# Altium PCB 如意硬件系统模块0831.PcbDoc (part 1 of 3)
Units mm, origin at the board's own origin, x right, y up, seen from the top; angles counter-clockwise.
Board outline 160 x 114.8 mm, 2 copper layers (Top Layer, Bottom Layer); 173 components, 141 nets, 673 pads, 206 vias.
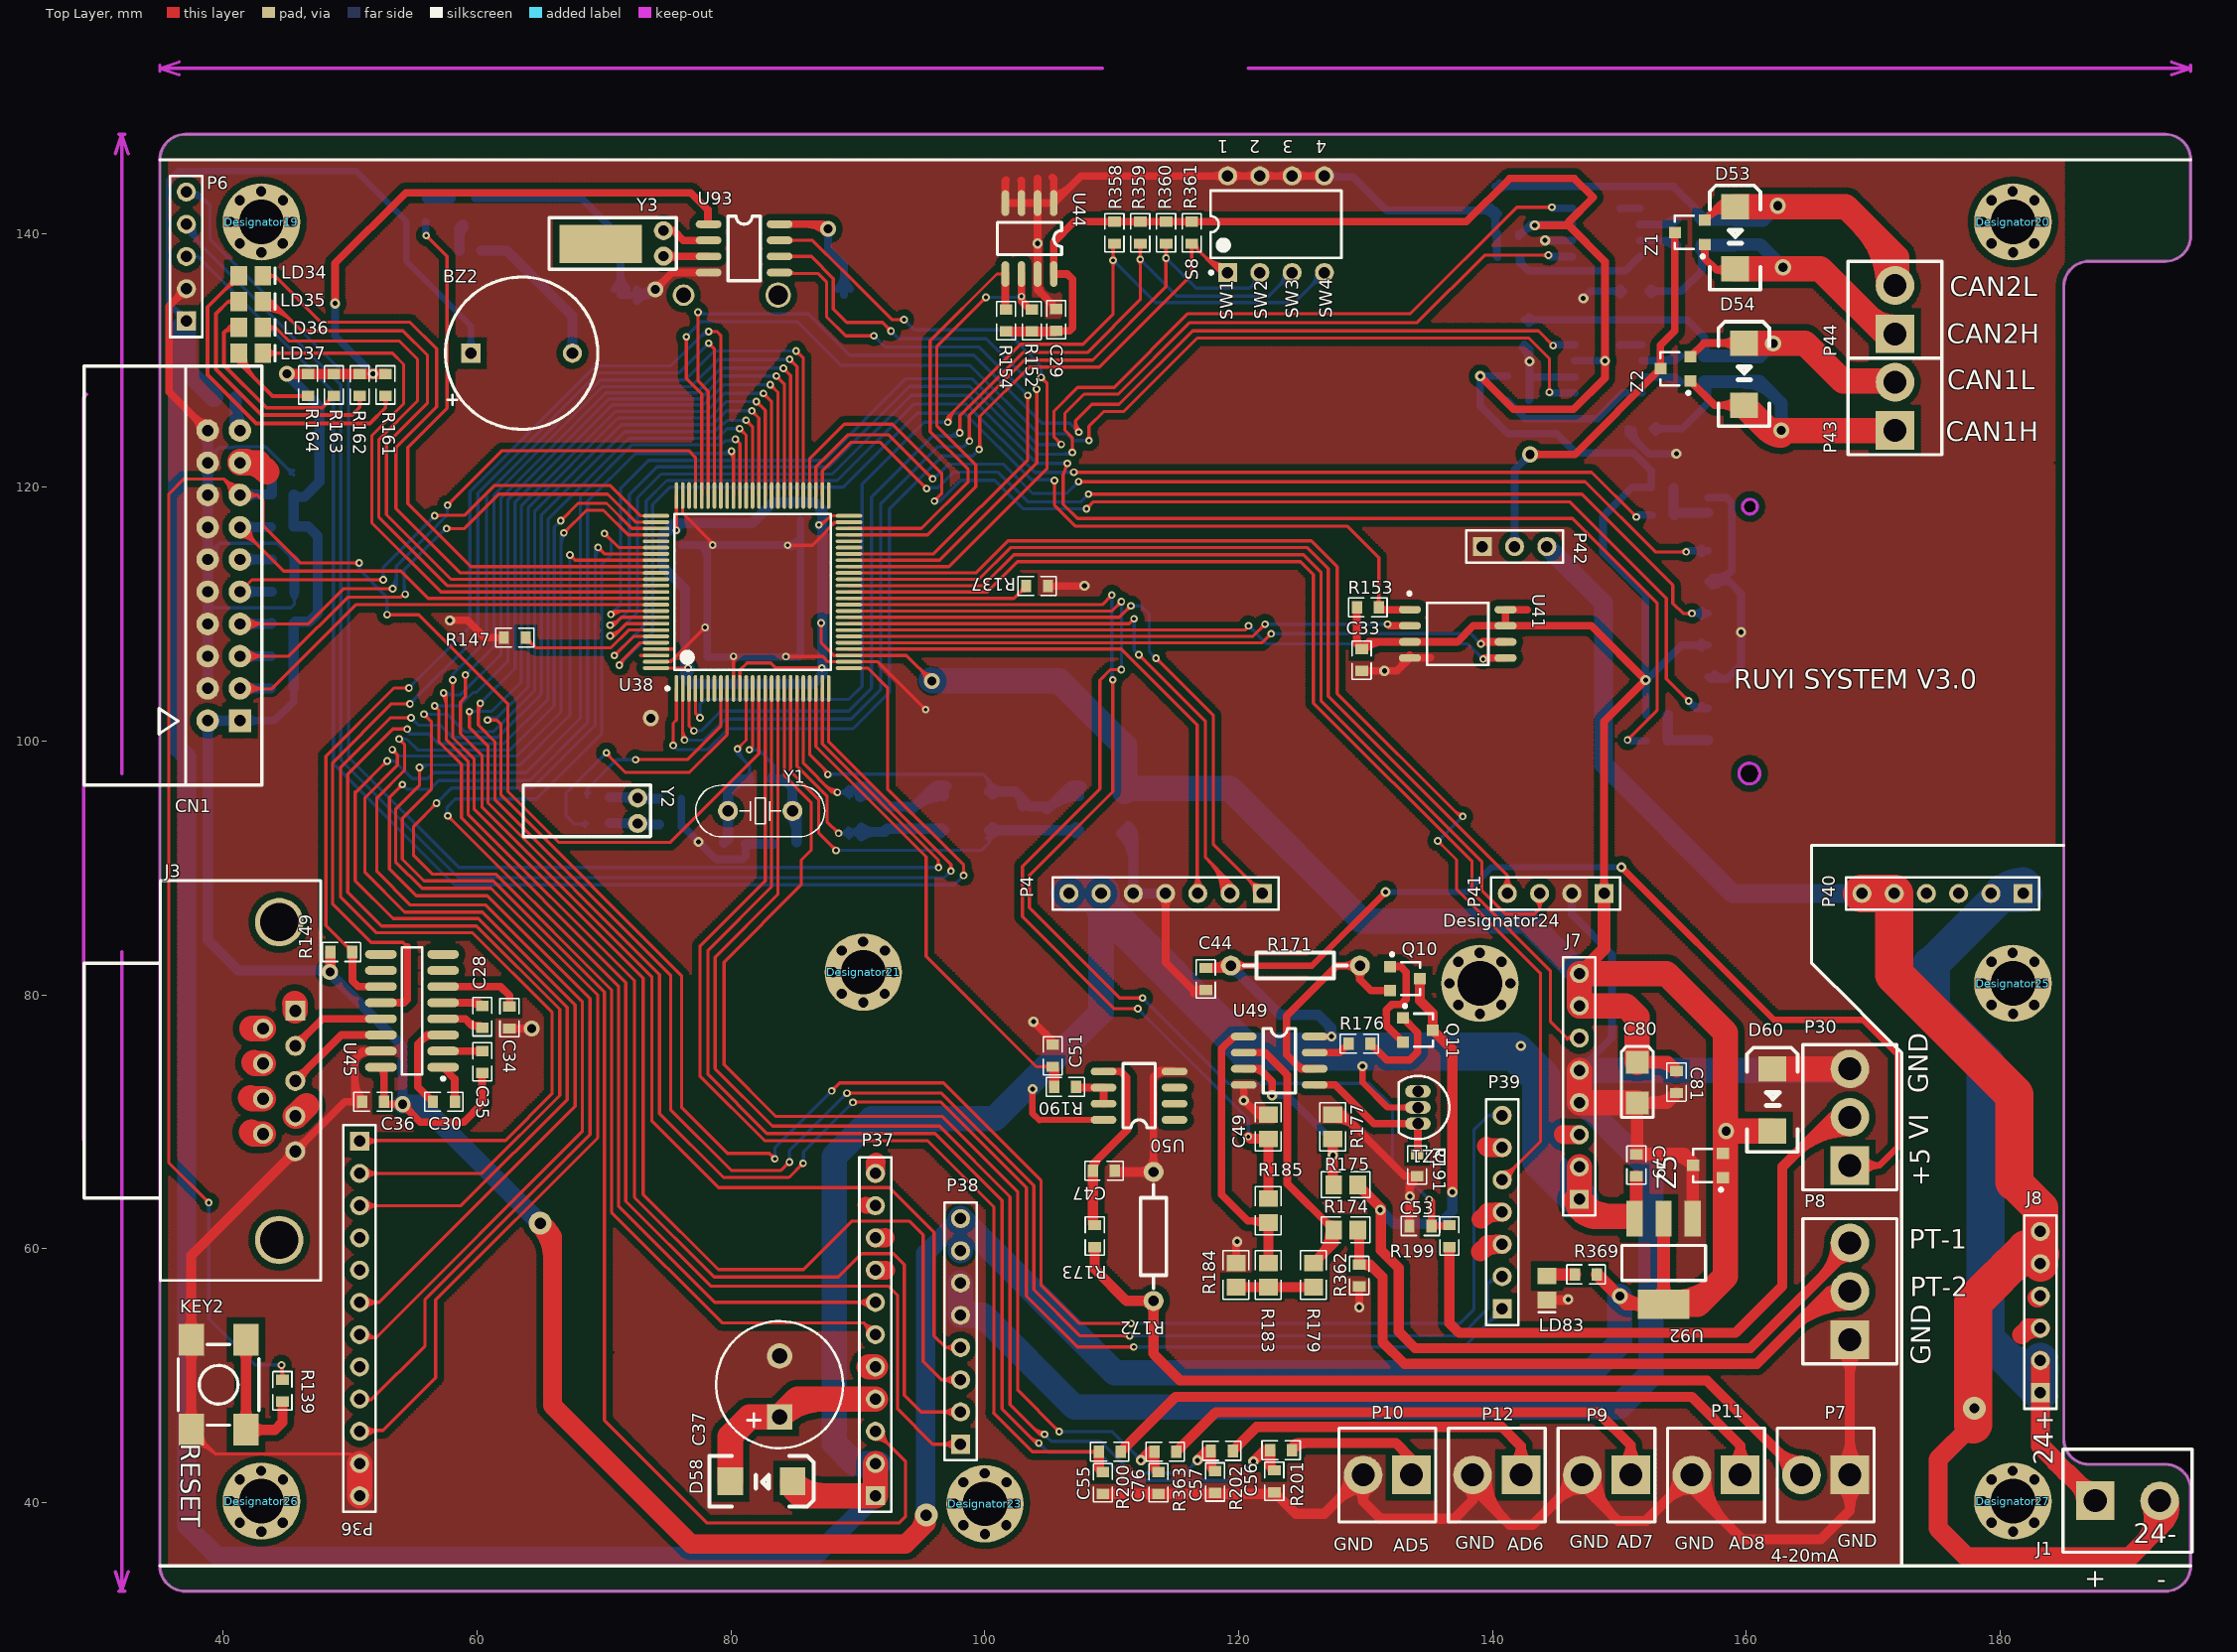
[diagram p0: Top Layer view]
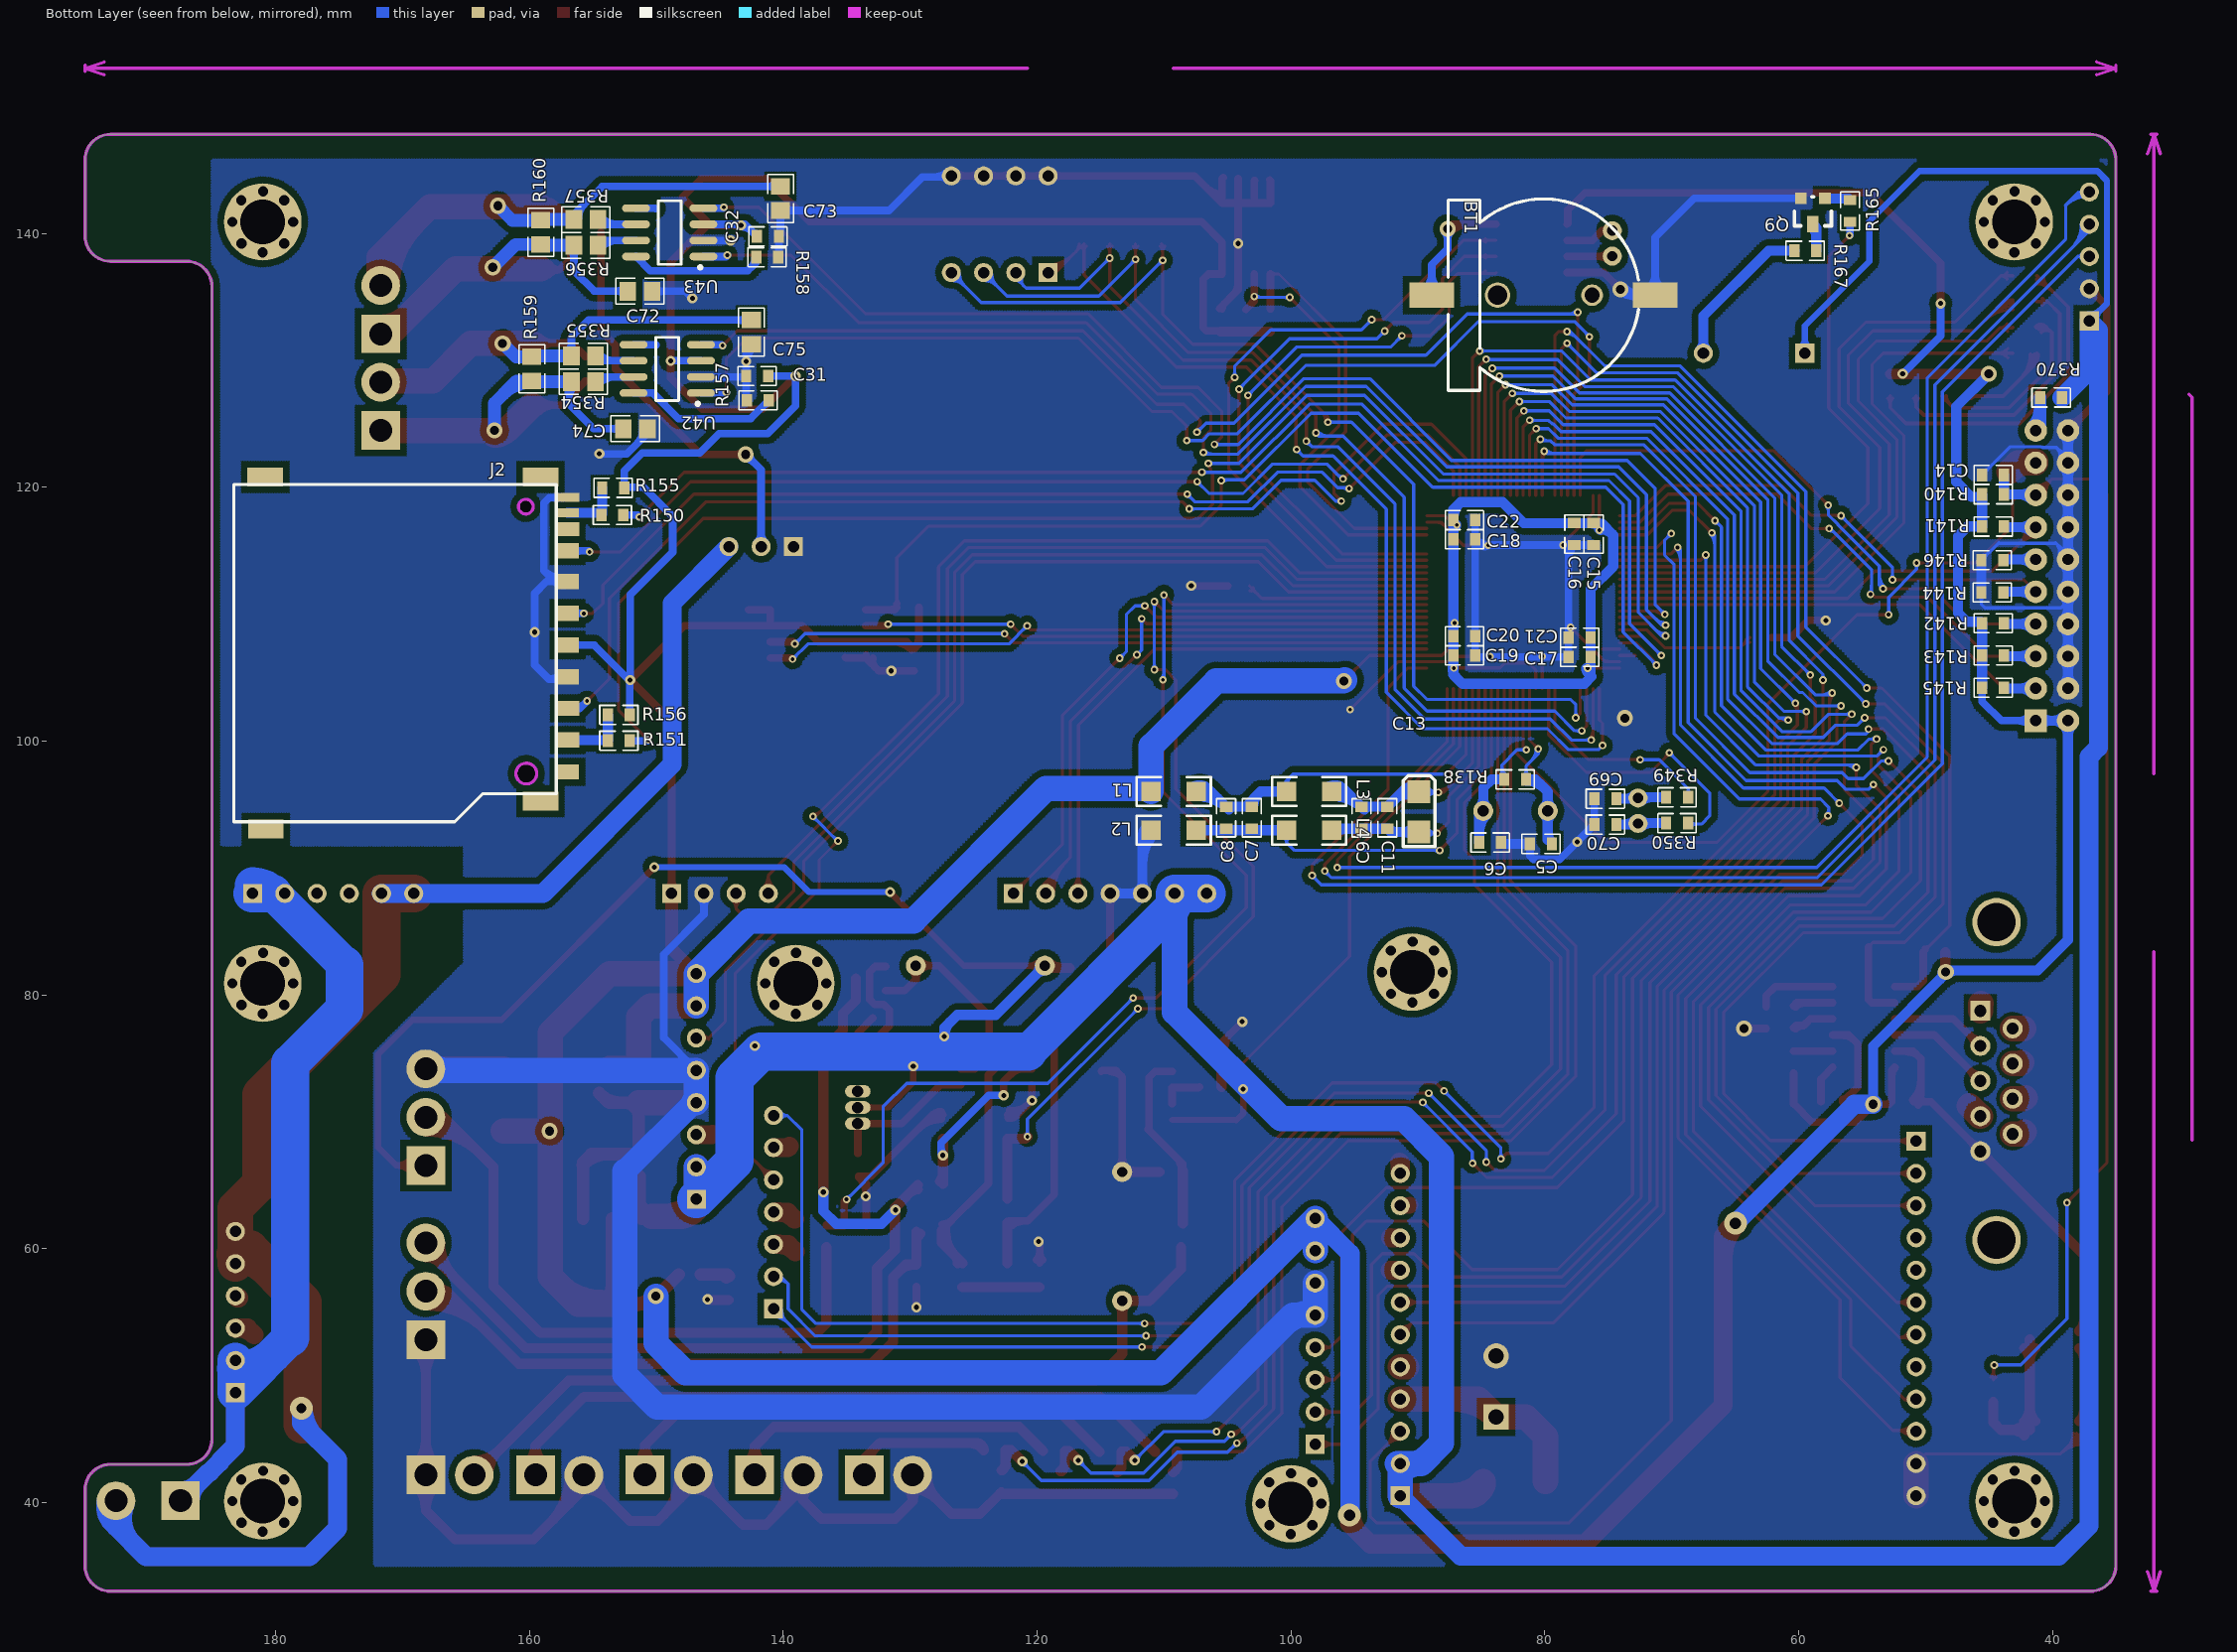
[diagram p1: Bottom Layer view, seen from below]

## Layer stack, top to bottom
Top Layer: signal copper 0.0356
Dielectric: dielectric 0.32, FR-4, Dk 4.8
Bottom Layer: signal copper 0.0356

## Board outline
35,35 ccw(c37,35) 37,33 193,33 ccw(c193,35) 195,35 195,41 ccw(c193,41) 193,43 187,43 cw(c187,45) 185,45 185,135.8 cw(c187,135.8) 187,137.8 193,137.8 ccw(c193,139.8) 195,139.8 195,145.8 ccw(c193,145.8) 193,147.8 37,147.8 ccw(c37,145.8) 35,145.8

## Design rules (kind name [scope] priority, off if disabled: settings)
Clearance Clearance_1 [InPolygon] p1: gap=0.5
Clearance [All] p2: gap=0.21
ComponentClearance [All] p1: gap=0 collisioncheckmode=3 verticalgap=0 showdistances=FALSE
FabricationTestpoint [(IsPad And (OnTopLayer Or OnBottomLayer))] p1: side=3 testpointundercomponent=TRUE minsize=1.016 maxsize=2.54 preferedsize=1.524 minholesize=0 maxholesize=1.016 preferedholesize=0.813 testpointgrid=0.025 allowsidetop=TRUE allowsidebottom=TRUE usegrid=TRUE gridtolerance=0
HoleToHoleClearance [All] p1: gap=0.2 allowstackedmicrovias=TRUE
PolygonConnect PolygonConnect_1 [IsVia Or IsSMTPin Or IsThruPin vs IsPoly] p1: connectstyle=Direct reliefconductorwidth=0.254 reliefentries=4 polygonreliefangle="90 Angle"
PolygonConnect [All] p2: connectstyle=Relief reliefconductorwidth=0.254 reliefentries=4 polygonreliefangle="90 Angle"
RoutingVias [All] p1: holewidth=0.711 width=1.27 viastyle="Through Hole" minholewidth=0.3 minwidth=0.6 maxholewidth=2 maxwidth=3
SilkToSilkClearance [All] p1: silktosilkclearance=0
SilkscreenOverComponentPads [All] p1: minsilkscreentomaskgap=0
SolderMaskExpansion [All] p1: expansion=0.102
Width Width_1 [InNet('VS+')  Or InNet('VS-') Or  InNet('+5V')] p1: maxlimit=3 minlimit=0.5 preferedwidth=1.5
Width [All] p2: maxlimit=2 minlimit=0.254 preferedwidth=0.6
23 further rules are at their usual default settings.

## Components (designator, comment, footprint, x,y, rotation, side; value= is the part's Value field where it differs from the comment)
BT1 "3.3V" BT2 88.9,135.128 r180 bottom
BZ2 "" BEEP 63.5,130.556 r0 top
C5 "20PF" 0603C-1 80.264,91.948 r180 bottom
C6 "20PF" 0603C-1 84.328,91.948 r0 bottom
C7 "0.1uf" 0603C-1 103.124,93.98 r90 bottom
C8 "0.1uf" 0603C-1 105.156,93.98 r90 bottom
C9 "0.1uf" 0603C-1 94.488,93.98 r90 bottom
C11 "0.1uf" 0603C-1 92.456,93.98 r90 bottom
C13 "10uf/10V" 1206D-S 89.916,96.012 r180 bottom
C14 "0.1uf" 0603C-1 44.704,120.904 r0 bottom
C15 "0.1uf" 0603C-1 76.2,116.332 r90 bottom
C16 "0.1uf" 0603C-1 77.724,116.332 r90 bottom
C17 "0.1uf" 0603C-1 77.216,106.68 r180 bottom
C18 "0.1uf" 0603C-1 86.36,115.824 r0 bottom
C19 "0.1uf" 0603C-1 86.36,106.68 r0 bottom
C20 "0.1uf" 0603C-1 86.36,108.204 r0 bottom
C21 "0.1uf" 0603C-1 77.216,108.204 r180 bottom
C22 "0.1uf" 0603C-1 86.36,117.348 r0 bottom
C28 "0.1uf" 0603C-1 60.452,78.232 r270 top
C29 "0.1uf" 0603C-1 105.67,133.156 r270 top
C30 "0.1uf" 0603C-1 57.404,71.628 r0 top
C31 "0.1uf" 0603C-1 142.017,128.814 r180 bottom
C32 "0.1uf" 0603C-1 141.224,139.7 r0 bottom
C33 "0.1uf" 0603C-1 129.631,106.409 r90 top
C34 "0.1uf" 0603C-1 62.484,78.232 r90 top
C35 "0.1uf" 0603C-1 60.452,74.676 r270 top
C36 "0.1uf" 0603C-1 51.816,71.628 r0 top
C37 "470uf/16V" C-RB-10 83.82,46.736 r90 top
C44 "0.1uF" 0603C-1 117.348,81.28 r90 top
C47 "0.1uF" 0603C-1 109.35,66.08 r180 top
C49 "0.1uf" 0805-1 122.328,69.6 r90 top
C51 "0.1uf" 0603C-1 105.286,75.224 r90 top
C53 "0.1uf" 0603C-1 134.281,61.728 r180 top
C55 "0.1uf" 0603C-1 109.357,41.508 r270 top
C56 "0.1uf" 0603C-1 122.859,41.637 r270 top
C57 "0.1uf" 0603C-1 118.187,41.578 r270 top
C69 "10PF" 0603C-1 75.184,95.504 r180 bottom
C70 "10PF" 0603C-1 75.184,93.472 r180 bottom
C72 "30pf" 0805-1 151.283,135.437 r180 bottom
C73 "30pf" 0805-1 140.208,142.748 r90 bottom
C74 "30pf" 0805-1 151.645,124.602 r180 bottom
C75 "30pf" 0805-1 142.501,132.222 r90 bottom
C76 "0.1uf" 0603C-1 113.734,41.508 r270 top
C79 "0.1uf" 0603C-1 151.384,66.548 r270 top
C80 "10uf" 1206D-S 151.384,74.676 r0 top
C81 "0.1uf" 0603C-1 154.432,73.152 r90 top
CN1 "JTAG" "JTAG20 - 15" 41.306,101.6 r90 top
D53 "P6KE33CA" SMB 159.094,142.106 r90 top
D54 "P6KE33CA" SMB 159.797,131.354 r90 top
D58 "IN4007" SMB 84.836,41.656 r0 top
D60 "SMAJ5A" SMB 162.052,74.168 r90 top
Designator19 "Comment" Hole-3MM 43,140.9 r0 top
Designator20 "Comment" Hole-3MM 181,140.9 r0 top
Designator21 "Comment" Hole-3MM 90.424,81.788 r0 top
Designator23 "Comment" Hole-3MM 100,39.9 r0 top
Designator24 "Comment" Hole-3MM 139,80.9 r0 top
Designator25 "Comment" Hole-3MM 181,80.9 r0 top
Designator26 "Comment" Hole-3MM 43,40.1 r0 top
Designator27 "Comment" Hole-3MM 181,40.1 r0 top
DZ1 "LM385-2.5" TO-92A 134.112,71.12 r180 top
J1 "CON2" JXZ-2 187.452,40.132 r0 top
J2 "SDCARD" SDC009-01-R2 156.972,100.076 r270 bottom
J3 "UART" DB9-M 45.67,78.74 r270 top
J7 "Header 8" HDR1X8 146.834,63.892 r90 top
J8 "Header 6" HDR1X6 183.152,48.652 r90 top
KEY2 "SW-PB" SW_PB4_A1 39.624,49.276 r90 top
L1 "Inductor" 1206 109.22,96.012 r180 bottom
L2 "Inductor" 1206 109.22,92.964 r180 bottom
L3 "Inductor" 1206 98.552,96.012 r180 bottom
L4 "Inductor" 1206 98.552,92.964 r180 bottom
LD34 "LED" LED_0805 42.164,136.652 r0 top
LD35 "LED" LED_0805 42.164,134.62 r0 top
LD36 "LED" LED_0805 42.164,132.588 r0 top
LD37 "LED" LED_0805 42.164,130.556 r0 top
LD83 "LED" LED_0805 144.272,56.896 r270 top
P4 "Header 7" HDR1X7 121.856,87.984 r180 top
P6 "Header 5" HDR1X5 37.084,133.096 r90 top
P7 "Header 2" KF3.81-2P 168.148,42.164 r180 top
P8 "Header 3" KF3.81-3P 168.148,52.832 r90 top
P9 "Header 2" KF3.81-2P 150.876,42.164 r180 top
P10 "Header 2" KF3.81-2P 133.604,42.164 r180 top
P11 "Header 2" KF3.81-2P 159.512,42.164 r180 top
P12 "Header 2" KF3.81-2P 142.24,42.164 r180 top
P30 "Header 3" KF3.81-3P 168.148,66.548 r90 top
P36 "Header 12" HDR1X12 50.736,68.464 r270 top
P37 "Header 11" HDR1X11 91.376,40.524 r90 top
P38 "Header 8" HDR1X8 98.084,44.588 r90 top
P39 "Header 7" HDR1X7 140.756,55.256 r90 top
P40 "Header 6" HDR1X6 181.8,87.984 r180 top
P41 "Header 4" HDR1X4 148.78,87.984 r180 top
P42 "Header 3" HDR1X3 139.192,115.316 r0 top
P43 "Header 2" KF3.81-2P 171.704,124.46 r90 top
P44 "Header 2" KF3.81-2P 171.704,132.08 r90 top
Q9 "9013" SOT23-BCE 57.912,142.748 r0 bottom
Q10 "S9015" SOT-23 133.096,81.28 r270 top
Q11 "S9015" SOT-23 134.112,77.216 r270 top
R137 "100k" 0603R-1 104.14,112.268 r0 top
R138 "1M" 0603R-1 82.296,97.028 r180 bottom
R139 "510" 0603R-1 44.704,48.768 r270 top
R140 "10k" 0603R-1 44.704,119.38 r0 bottom
R141 "10k" 0603R-1 44.704,116.84 r0 bottom
R142 "10k" 0603R-1 44.704,109.22 r0 bottom
R143 "10k" 0603R-1 44.704,106.68 r0 bottom
R144 "10k" 0603R-1 44.704,111.76 r180 bottom
R145 "10k" 0603R-1 44.704,104.14 r0 bottom
R146 "10k" 0603R-1 44.704,114.3 r180 bottom
R147 "10K" 0603R-1 62.992,108.204 r0 top
R149 "10k" 0603R-1 49.276,83.312 r180 top
R150 "10k" 0603R-1 153.416,117.856 r180 bottom
R151 "0" 0603R-1 152.908,100.076 r180 bottom
R152 "10k" 0603R-1 103.638,133.156 r90 top
R153 "10k" 0603R-1 130.139,110.473 r180 top
R154 "10k" 0603R-1 101.606,133.156 r90 top
R155 "10k" 0603R-1 153.416,119.888 r0 bottom
R156 "10k" 0603R-1 152.908,102.108 r180 bottom
R157 "0" 0603R-1 142.017,126.782 r0 bottom
R158 "0" 0603R-1 141.224,138.176 r180 bottom
R159 "120" 0805-1 159.797,129.322 r90 bottom
R160 "120" 0805-1 159.094,140.074 r90 bottom
R161 "220" 0603R-1 52.832,128.016 r270 top
R162 "220" 0603R-1 50.8,128.016 r270 top
R163 "220" 0603R-1 48.768,128.016 r270 top
R164 "220" 0603R-1 46.736,128.016 r270 top
R165 "1K" 0603R-1 55.88,141.732 r270 bottom
R167 "0" 0603R-1 59.436,138.684 r180 bottom
R171 "2.7K" AXIAL0.4 129.54,82.296 r180 top
R172 "100(1%)" AXIAL0.4 113.284,66.04 r270 top
R173 "47K" 0603R-1 108.712,60.96 r270 top
R174 "100K" 0805-1 128.424,61.472 r0 top
R175 "200K" 0805-1 128.424,65.028 r0 top
R176 "1K" 0603R-1 129.54,76.2 r0 top
R177 "100K" 0805-1 127.408,69.6 r270 top
R179 "200K" 0805-1 125.884,57.916 r270 top
R183 "10K" 0805-1 122.328,57.916 r270 top
R184 "1K" 0805-1 119.788,57.916 r90 top
R185 "200K" 0805-1 122.328,62.996 r90 top
R190 "1K" 0603R-1 106.302,72.684 r180 top
R191 "4.7K" 0603R-1 134.112,66.548 r270 top
R199 "1K" 0603R-1 136.652,60.96 r270 top
R200 "1K" 0603R-1 109.865,44.048 r0 top
R201 "1K" 0603R-1 123.367,44.177 r0 top
R202 "1K" 0603R-1 118.695,44.118 r0 top
R349 "0" 0603R-1 69.596,95.504 r0 bottom
R350 "0" 0603R-1 69.596,93.472 r0 bottom
R354 "5" 0805-1 155.733,128.306 r0 bottom
R355 "5" 0805-1 155.733,130.338 r0 bottom
R356 "5" 0805-1 155.538,139.058 r0 bottom
R357 "5" 0805-1 155.538,141.09 r0 bottom
R358 "10k" 0603R-1 110.148,140.074 r90 top
R359 "10k" 0603R-1 112.18,140.074 r90 top
R360 "10k" 0603R-1 114.212,140.074 r90 top
R361 "10k" 0603R-1 116.244,140.074 r90 top
R362 "0" 0603R-1 129.44,57.916 r90 top
R363 "1K" 0603R-1 114.242,44.048 r0 top
R369 "330" 0603R-1 147.32,57.912 r180 top
R370 "0" 0603R-1 40.132,127 r0 bottom
S8 "SW DIP-4" DIP-8 122.936,140.716 r90 top
U38 "STM32F107VCT6" LQFP100_M 75.692,104.14 r90 top
U41 "W25Q16" SOIC8_W 137.251,108.441 r0 top
U42 "VP230" NSO8_N 149.129,129.322 r0 bottom
U43 "VP230" NSO8_N 148.934,140.074 r0 bottom
U44 "AT24C02" SO-8 105.42,142.381 r270 top
U45 "MAX3232" NSO16_M 54.864,78.74 r180 top
U49 "LM358" SO-8 120.396,76.708 r0 top
U50 "LM358" SO-8 114.938,70.144 r180 top
U92 "LM1117-3.3" ASM1117 153.416,58.928 r180 top
U93 "DS1302" SO-8 78.232,140.716 r0 top
Y1 "8MHz" XTAL1 79.756,94.488 r0 top
Y2 "32.768KHz" XTAL4 72.644,95.504 r270 top
Y3 "32.768KHz" XTAL5 74.676,140.208 r270 top
Z1 "NUP2105L" SOT-23 155.538,140.074 r90 top
Z2 "NUP2105L" SOT-23 154.404,129.327 r90 top
Z5 "NUP2105L" SOT-23 156.972,66.548 r90 top

## Footprints (in the part's own frame and the unit in brackets; to place one, negate y for a bottom-side part, rotate by r counter-clockwise, add the part's x,y. Pads: shape width x height; smd on the part's side, far side on the other; paste and mask are expansions set on the pad)
0603C-1 [mm]
  rect 0.813x1 smd: 1(-0.892,-0.057) 2(0.835,-0.057)
  silkscreen extent -1.54,-0.81 1.47,0.69
0603R-1 [mm]
  rect 0.813x1 smd: 1(-0.892,-0.057) 2(0.835,-0.057)
  silkscreen extent -1.54,-0.81 1.47,0.69
0805-1 [mm] "贴片带丝印"
  rect 1.3x1.5 smd: 1(-0.95,0) 2(0.95,0)
  silkscreen extent -1.91,-1.02 1.91,1.02, body extent -1.14,-0.51 1.14,0.51, height 1
1206 [mil] "贴片元件"
  rect 60x60 smd: 1(-70,0) 2(70,0)
  silkscreen extent -115,-45 115,45, body extent -75,-35 75,35, height 39
1206D-S [mm]
  rect 1.8x1.8 smd: 1(0,0) 2(0,-3.186)
  silkscreen extent -1.23,-4.34 1.27,1.26
ASM1117 [mil]
  rect 50x110 smd: 1(-92.17,-135.19) 2(-1.93,-135.31) 3(88.23,-135.31)
  rect 160x90 smd: 4(-2.72,130.44)
  silkscreen extent -133,-52 127,57
AXIAL0.4 [mil]
  round 62 hole 32: 1(0,0) 2(400,0)
  silkscreen extent 40,-40 360,40
BEEP [mm] "蜂鸣器"
  rect 1.5x1.5 hole 0.9: 1(-4,0)
  round 1.5 hole 0.9: 2(4,0)
  silkscreen extent -6,-6 6,6
BT2 [mm]
  round 2 hole 1.5: 0(5.19,0)
  round 1.7 hole 1.2: 0(12.64,0)
  rect 3.5x2 smd: 1(0,0) 2(17.6,0)
  silkscreen extent 1.3,-7.58 16.3,7.58
C-RB-10 [mm] "35V470uF电容"
  rect 2x2 hole 1.2: 1(0,0)
  round 2 hole 1.2: 2(4.8,0)
  silkscreen extent -2.46,-5 7.54,5
DB9-M [mil] "DB9公座"
  rect 62x62 hole 38: 1(0,0)
  round 62 hole 38: 2(109,0) 3(218,0) 4(327,0) 5(436,0) 6(55,-100) 7(164,-100) 8(273,-100) 9(382,-100)
  round 150 hole 118.11: 10(711,-50) 11(-275,-50)
  silkscreen extent -404,-655 837,79, body extent -405,-680 835,75, height 394
DIP-8 [mm] "DIP; 8 Leads; Row Spacing 7.62 mm; Pitch 2.54 mm"
  rect 1.5x1.5 hole 0.9: 1(-3.81,3.81)
  round 1.5 hole 0.9: 2(-3.81,1.27) 3(-3.81,-1.27) 4(-3.81,-3.81) 5(3.81,-3.81) 6(3.81,-1.27) 7(3.81,1.27) 8(3.81,3.81)
  silkscreen extent -3.93,-5.15 2.65,5.23, body extent -3.6,-5.15 3.6,5.15, height 5.08
HDR1X3 [mm] "Connector; Header; 3 Position"
  rect 1.5x1.5 hole 0.9: 1(0,0)
  round 1.5 hole 0.9: 2(2.54,0) 3(5.08,0)
  silkscreen extent -1.27,-1.27 6.35,1.27
HDR1X4 [mm] "Connector; Header; 4 Position"
  rect 1.5x1.5 hole 0.9: 1(0,0)
  round 1.5 hole 0.9: 2(2.54,0) 3(5.08,0) 4(7.62,0)
  silkscreen extent -1.27,-1.27 8.89,1.27
HDR1X5 [mm] "Connector; Header; 5 Position"
  rect 1.5x1.5 hole 0.9: 1(0,0)
  round 1.5 hole 0.9: 2(2.54,0) 3(5.08,0) 4(7.62,0) 5(10.16,0)
  silkscreen extent -1.27,-1.27 11.43,1.27
HDR1X6 [mm] "Connector; Header; 6 Position"
  rect 1.5x1.5 hole 0.9: 1(0,0)
  round 1.5 hole 0.9: 2(2.54,0) 3(5.08,0) 4(7.62,0) 5(10.16,0) 6(12.7,0)
  silkscreen extent -1.27,-1.27 13.97,1.27
HDR1X7 [mm] "Connector; Header; 7 Position"
  rect 1.5x1.5 hole 0.9: 1(0,0)
  round 1.5 hole 0.9: 2(2.54,0) 3(5.08,0) 4(7.62,0) 5(10.16,0) 6(12.7,0) 7(15.24,0)
  silkscreen extent -1.27,-1.27 16.51,1.27
HDR1X8 [mm] "Connector; Header; 8 Position"
  rect 1.5x1.5 hole 0.9: 1(0,0)
  round 1.5 hole 0.9: 2(2.54,0) 3(5.08,0) 4(7.62,0) 5(10.16,0) 6(12.7,0) 7(15.24,0) 8(17.78,0)
  silkscreen extent -1.27,-1.27 19.05,1.27
HDR1X11 [mm] "Connector; Header; 11 Position"
  rect 1.5x1.5 hole 0.9: 1(0,0)
  round 1.5 hole 0.9: 2(2.54,0) 3(5.08,0) 4(7.62,0) 5(10.16,0) 6(12.7,0) 7(15.24,0) 8(17.78,0) 9(20.32,0) 10(22.86,0) 11(25.4,0)
  silkscreen extent -1.27,-1.27 26.67,1.27
HDR1X12 [mm] "Connector; Header; 12 Position"
  rect 1.5x1.5 hole 0.9: 1(0,0)
  round 1.5 hole 0.9: 2(2.54,0) 3(5.08,0) 4(7.62,0) 5(10.16,0) 6(12.7,0) 7(15.24,0) 8(17.78,0) 9(20.32,0) 10(22.86,0) 11(25.4,0) 12(27.94,0)
  silkscreen extent -1.27,-1.27 29.21,1.27
Hole-3MM [mm]
  round 6.1 hole 3.5: 0(0,0)
  round 1 hole 0.8: 2(-2.4,0) 3(-0.025,2.4) 4(2.4,0) 5(0,-2.4) 6(-1.7,1.7) 7(1.7,1.7) 8(1.675,-1.7) 9(-1.7,-1.7)
"JTAG20 - 15" [mil]
  rect 70x70 hole 35: 1(0,0)
  round 70 hole 35: 2(0,100) 3(100,0) 4(100,100) 5(200,0) 6(200,100) 7(300,0) 8(300,100) 9(400,0) 10(400,100) 11(500,0) 12(500,100) 13(600,0) 14(600,100) 15(700,0) 16(700,100) 17(800,0) 18(800,100) 19(900,0) 20(900,100)
  silkscreen extent -200,-68 1100,483
JXZ-2 [mil]
  rect 120x120 hole 70.87: 1(1.13,0)
  round 120 hole 70.87: 2(201.13,0)
  silkscreen extent -99,-160 301,160
KF3.81-2P [mil]
  rect 120x120 hole 70.87: 1(0,0)
  round 120 hole 70.87: 2(150,0)
  silkscreen extent -75,-146 225,146
KF3.81-3P [mil]
  rect 120x120 hole 70.87: 1(0,0)
  round 120 hole 70.87: 2(150,0) 3(300,0)
  silkscreen extent -75,-146 375,146
LED_0805 [mm] "贴片二极管"
  rect 1.3x1.5 smd: 1(-0.95,0) 2(0.95,0)
  silkscreen extent 1.91,-0.64 1.91,0.64
LQFP100_M [mm]
  oval 2.1x0.29 smd: 1(0,0) 2(0,-0.5) 3(0,-1) 4(0,-1.5) 5(0,-2) 6(0,-2.5) 7(0,-3) 8(0,-3.5) 9(0,-4) 10(0,-4.5) 11(0,-5) 12(0,-5.5) 13(0,-6) 14(0,-6.5) 15(0,-7) 16(0,-7.5) 17(0,-8) 18(0,-8.5) 19(0,-9) 20(0,-9.5) 21(0,-10) 22(0,-10.5) 23(0,-11) 24(0,-11.5) 25(0,-12) 51(15.2,-12) 52(15.2,-11.5) 53(15.2,-11) 54(15.2,-10.5) 55(15.2,-10) 56(15.2,-9.5) 57(15.2,-9) 58(15.2,-8.5) 59(15.2,-8) 60(15.2,-7.5) 61(15.2,-7) 62(15.2,-6.5) 63(15.2,-6) 64(15.2,-5.5) 65(15.2,-5) 66(15.2,-4.5) 67(15.2,-4) 68(15.2,-3.5) 69(15.2,-3) 70(15.2,-2.5) 71(15.2,-2) 72(15.2,-1.5) 73(15.2,-1) 74(15.2,-0.5) 75(15.2,0)
  oval 0.29x2.1 smd: 26(1.6,-13.6) 27(2.1,-13.6) 28(2.6,-13.6) 29(3.1,-13.6) 30(3.6,-13.6) 31(4.1,-13.6) 32(4.6,-13.6) 33(5.1,-13.6) 34(5.6,-13.6) 35(6.1,-13.6) 36(6.6,-13.6) 37(7.1,-13.6) 38(7.6,-13.6) 39(8.1,-13.6) 40(8.6,-13.6) 41(9.1,-13.6) 42(9.6,-13.6) 43(10.1,-13.6) 44(10.6,-13.6) 45(11.1,-13.6) 46(11.6,-13.6) 47(12.1,-13.6) 48(12.6,-13.6) 49(13.1,-13.6) 50(13.6,-13.6) 76(13.6,1.6) 77(13.1,1.6) 78(12.6,1.6) 79(12.1,1.6) 80(11.6,1.6) 81(11.1,1.6) 82(10.6,1.6) 83(10.1,1.6) 84(9.6,1.6) 85(9.1,1.6) 86(8.6,1.6) 87(8.1,1.6) 88(7.6,1.6) 89(7.1,1.6) 90(6.6,1.6) 91(6.1,1.6) 92(5.6,1.6) 93(5.1,1.6) 94(4.6,1.6) 95(4.1,1.6) 96(3.6,1.6) 97(3.1,1.6) 98(2.6,1.6) 99(2.1,1.6) 100(1.6,1.6)
  silkscreen extent -0.12,-12.15 13.75,0.82
NSO8_N [mm] "SOIC-max660"
  oval 2.2x0.6 smd: 1(-2.654,1.905) 2(-2.654,0.635) 3(-2.654,-0.635) 4(-2.654,-1.905) 5(2.654,-1.905) 6(2.654,-0.635) 7(2.654,0.635) 8(2.654,1.905)
  silkscreen extent -2.52,-2.5 0.9,2.88, body extent -1.95,-2.45 1.95,2.45, height 1.75
NSO16_M [mm] "SOIC, 16-Leads, Body 9.9x3.9mm, Pitch 1.27mm, IPC Low Density"
  oval 2.5x0.7 smd: 1(-2.45,4.445) 2(-2.45,3.175) 3(-2.45,1.905) 4(-2.45,0.635) 5(-2.45,-0.635) 6(-2.45,-1.905) 7(-2.45,-3.175) 8(-2.45,-4.445) 9(2.45,-4.445) 10(2.45,-3.175) 11(2.45,-1.905) 12(2.45,-0.635) 13(2.45,0.635) 14(2.45,1.905) 15(2.45,3.175) 16(2.45,4.445)
  silkscreen extent -2.58,-5 0.8,5.47, body extent -2,-5 2,5, height 1.75
SDC009-01-R2 [mm]
  rect 1.2x1.8 smd: 1(0,0) 2(-2.489,0) 3(-4.983,-0.009) 4(-7.483,-0.009) 5(-9.983,-0.009) 6(-12.483,-0.009) 7(-14.908,-0.009) 9(2.517,-0.009)
  rect 1.1x1.8 smd: 8(-16.612,0)
  rect 0.7x1.8 smd: 10(-17.908,-0.009) 12(-19.101,0)
  rect 1.5x2.8 smd: 11(-20.726,-23.834) 11(-20.726,-2.143) 11(4.826,-2.143) 11(7.01,-23.784)
  Keep-Out Layer circle w0.254: c2.642,-3.26 r0.82
  Keep-Out Layer circle w0.254: c-18.39,-3.3 r0.58
  silkscreen extent -20.13,-26.3 6.44,-0.9
SMB [mm]
  rect 2x2.2 smd: 1(0,0) 2(-4.9,0)
  silkscreen extent -6.54,-1.99 1.67,2
SO-8 [mil]
  oval 80x24 smd: 1(0,0) 2(0,-50) 3(0,-100) 4(0,-150) 5(220,-150) 6(220,-100) 7(220,-50) 8(220,0)
  silkscreen extent 60,-175 160,25
SOIC8_W [mm] "SPI_FLASH"
  oval 1.75x0.6 smd: 1(-3.768,1.905) 2(-3.768,0.635) 3(-3.768,-0.635) 4(-3.768,-1.905) 5(3.768,-1.905) 6(3.768,-0.635) 7(3.768,0.635) 8(3.768,1.905)
  silkscreen extent -3.93,-2.45 2.41,3.3
SOT23-BCE [mil]
  rect 36x36 smd: B(0,0) E(75,0)
  rect 36x50 smd: C(38,80)
  silkscreen extent -20,-5 95,85
SOT-23 [mm]
  rect 0.9x0.95 smd: 1(-0.95,-1.175) 2(0.95,-1.175) 3(0,1.175)
  silkscreen extent -2.03,-1.14 1.3,1.18
SW_PB4_A1 [mm]
  rect 2.5x2 smd: 1(-3.556,2.159) 2(-3.556,-2.159) 3(3.556,-2.159) 4(3.556,2.159)
  silkscreen extent -3.17,-3.17 3.17,3.17, body extent -3.18,-3.18 3.18,3.18, height 6
TO-92A [mm]
  oval 2x1 hole 0.9: 1(0,1.27) 2(0,0) 3(0,-1.27)
  silkscreen extent -2.48,-2.48 1.5,2.48
XTAL1 [mil]
  round 62 hole 35.43: 1(0,0) 2(200,0)
  silkscreen extent -100,-80 300,80
XTAL4 [mm]
  round 1.5 hole 0.8: 1(0,0) 2(2.007,0)
  silkscreen extent -1.02,-9.02 3.05,1.02
XTAL5 [mm]
  round 1.5 hole 0.8: 1(2.007,0) 2(0,0)
  rect 3x6.5 smd: ""(1.041,-4.945)
  silkscreen extent -1.02,-9.02 3.05,1.02

## Part data
BT1: library part BATTERY, "Battery"
BZ2: library part BUZZER
C5 C6 C7 C8 C9 C11 C14 C15 C16 C17 C18 C19 C20 C21 C22 C28 C29 C30 C31 C32 C33 C34 C35 C36 C44 C47 C69 C70 C72 C73 C74 C75: library part CAP, "Capacitor"
C13: library part JXC
C37: library part ELECTRO1, "Electrolytic Capacitor"
C49 C51 C53 C55 C56 C57 C76: library part C
C79 C81: library part CAP0, "CAP"
C80: library part ECAP
CN1: library part JTAG20
D53 D54 D60: library part TVS
D58: library part DIODE, "Diode"
DZ1: library part LM385BYZ-2.5, "Micropower Voltage Reference Diode"
J1: "Connector"
J2: "SD卡自弹"
J3: library part "D Connector 9", "Receptacle Assembly, 9 Position, Right Angle"
J7 P38: "Header, 8-Pin"
J8 P7 P8 P9 P10 P11 P12 P30 P43 P44: "接插件"
KEY2: "Switch"
L1 L2 L3 L4: "电感"
P4 P39: "Header, 7-Pin"
P6: "Header, 5-Pin"
P36: "Header, 12-Pin"
P37: "Header, 11-Pin"
P40: "Header, 6-Pin"
P41: "Header, 4-Pin"
P42: "Header, 3-Pin"
Q9: library part NPN
Q10 Q11: library part S9015_1, "PNP三极管"
R137 R140 R141 R142 R143 R144 R145 R146 R149 R150 R151 R152 R153 R154 R155 R156 R157 R158 R159 R160 R354 R355 R356 R357 R358 R359 R360 R361 R362 R370: library part RES2
R138 R139 R147 R161 R162 R163 R164 R165 R167 R171 R173 R174 R175 R176 R177 R179 R183 R184 R185 R190 R191 R199 R200 R201 R202 R349 R350 R363 R369: library part RES-2
R172: library part Res2, "Resistor"
S8: "编码开关"
U41: library part W25QXX, "SPI FLASH"
U42 U43: library part SN65HVD230, "CANоƬ"
U44: library part AT24C128
U45: library part MAX232, "+5V Powered, Multi-Channel RS-232 Driver/Receiver"
U92: library part LM1117
Y1 Y2: library part CRYSTAL, "Crystal"
Y3: library part XTAL
Z1 Z2 Z5: library part PESD1CAN, "过压保护"

## Via types
v1: diameter 0.6, hole 0.3, Top Layer to Bottom Layer, 151 vias
v2: diameter 0.8, hole 0.4, Top Layer to Bottom Layer, 35 vias
v3: diameter 1.27, hole 0.711, Top Layer to Bottom Layer, 15 vias
v4: diameter 1.8, hole 0.9, Top Layer to Bottom Layer, 2 vias
v5: diameter 1.8, hole 0.8, Top Layer to Bottom Layer, 1 vias
v6: diameter 1.66, hole 1.66, Top Layer to Bottom Layer, 1 vias
v7: diameter 1.18, hole 1.18, Top Layer to Bottom Layer, 1 vias

## Nets (pads, with @x,y where several pads share a name; then routed paths per layer and width w, separated by ;. In a path a pad name is that pad's centre, name@x,y a point inside that pad or via, vN(x,y) a via of type N, cw(c..) or ccw(c..) an arc to the next point about the centre after c; other vN are vias at no path point)
4-20MAIN1: P7.2 R172.2 R173.2 | length 73.8
  Top Layer w0.8: R173.2@108.655,60.125 108.655,58.37 111.145,55.88 R172.2@113.284,55.88 113.284,51.716 115.4,49.6 156.902,49.6 P7.2@164.338,42.164 ; R172.2@113.01,56.154 cw(c112.349,56.815) 112.349,55.88 cw(c112.349,54.945) 113.01,55.606 cw(c112.349,54.945) 113.284,54.945 cw(c114.219,54.945) R172.2@113.558,55.606 ; P7.2@163.214,42.164 ccw(c160.5,42.164) 162.419,44.083 ccw(c164.338,46.002) P7.2@164.338,43.288
165_CLK: P4.2 U38.33 | length 58.8
  Top Layer w0.254: U38.33@89.292,109.24 111.365,109.24 v1(111.75,109.625) ; v1@112.125,106.627 cw(c112.125,106.209) 112.42,106.505 cw(c112.716,106.8) v1@112.298,106.8 ; v1(112.125,106.8) 117.375,101.55 117.375,90.8 119.316,88.859 ; 117.634,90.541 cw(c115.077,87.984) P4.2@118.693,87.984 ; 118.067,90.108 cw(c115.944,87.984) P4.2@118.947,87.984 ; 118.501,89.674 cw(c116.811,87.984) P4.2@119.201,87.984 ; 118.935,89.24 cw(c117.678,87.984) P4.2@119.455,87.984 ; P4.2@119.112,88.573 ccw(c119.013,88.859) 119.316,88.859 ; P4.2@119.316,87.984 119.316,88.859 ; 119.368,88.807 cw(c118.545,87.984) P4.2@119.709,87.984 ; P4.2@119.52,88.573 cw(c119.619,88.859) 119.316,88.859
  Bottom Layer w0.254: v1@111.628,109.503 cw(c111.332,109.207) 111.75,109.207 cw(c112.168,109.207) v1@111.872,109.503 ; v1(111.75,109.625) 111.75,107.175 v1(112.125,106.8)
165_QH: P4.1 U38.34 | length 56.4
  Top Layer w0.254: U38.34@89.292,109.74 110.59,109.74 v1(111.5,110.65) ; v1@111.327,110.65 cw(c110.909,110.65) 111.205,110.355 cw(c111.5,110.059) v1@111.5,110.477 ; v1@113.475,106.352 cw(c113.475,105.934) 113.77,106.23 cw(c114.066,106.525) v1@113.648,106.525 ; v1(113.475,106.525) 118,102 118,91.84 P4.1@121.856,87.984 ; P4.1@121.233,87.984 ccw(c119.729,87.984) 120.792,89.048 ccw(c121.856,90.111) P4.1@121.856,88.607 ; P4.1@121.487,87.984 ccw(c120.596,87.984) 121.226,88.614 ccw(c121.856,89.244) P4.1@121.856,88.353
  Bottom Layer w0.254: v1(111.5,110.65) 112.275,110.65 112.95,109.975 112.95,107.05 v1(113.475,106.525) ; v1@111.622,110.528 cw(c111.918,110.232) 111.918,110.65 cw(c111.918,111.068) v1@111.622,110.772 ; v1@113.302,106.525 ccw(c112.884,106.525) 113.18,106.82 ccw(c113.475,107.116) v1@113.475,106.698
165_SH/LD: P4.3 U38.29 | length 47
  Top Layer w0.254: U38.29@89.292,107.24 110.735,107.24 116.725,101.25 116.725,88.035 P4.3@116.776,87.984 ; P4.3@116.335,88.425 ccw(c115.395,89.365) 116.725,89.365 ; P4.3@116.515,88.245 ccw(c116.008,88.752) 116.725,88.752 ; 116.725,88.998 ccw(c117.79,88.998) P4.3@117.037,88.245 ; 116.725,89.611 ccw(c118.403,89.611) P4.3@117.217,88.425
+3.3V: C15.2 C16.2 C17.2 C18.2 C19.2 C20.2 C21.2 C22.2 C29.2 C31.2 C32.2 C33.2 C35.2 C36.2 C80.1 C81.2 CN1.1 CN1.2 D60.2 J2.4 J7.7 J7.8 L1.1 P38.7 P38.8 P41.1 R140.2 R141.2 R142.2 R143.2 R145.2 R149.2 R152.1 R153.2 R154.1 R155.1 R156.2 R161.1 R162.1 R163.1 R164.1 R358.2 R359.2 R360.2 R361.2 R369.1 U38.11 U38.28 U38.50 U38.75 U38.100 U41.3 U41.7 U41.8 U42.3 U43.3 U44.8 U45.16 U92.2 U92.4 U93.1 Z5.1 Z5.2 | length 770.7
  Top Layer w0.254: U38.100@74.092,105.74 v1(76.615,105.74) v1@76.625,105.75 ; v1@75.578,116.722 ccw(c75.302,116.998) 75.692,116.998 ; v1@75.675,116.6 75.692,116.617 U38.75@75.692,119.34 ; 75.692,117.037 ccw(c76.137,117.037) v1@75.822,116.722 ; v1@76.493,105.618 ccw(c76.197,105.322) 76.197,105.74 ccw(c76.197,106.158) v1@76.493,105.862 ; U38.11@80.692,104.14 80.692,105.584 81.229,106.121 ; 81.255,106.147 83.134,106.147 83.531,105.75 v1(87.15,105.75) ; v1(86.919,117.018) 86.919,116.831 87.105,117.018 87.118,117.018 87.84,117.74 U38.50@89.292,117.74 ; v1@86.919,117.191 ccw(c86.919,118.089) 87.554,117.454 ; v1@86.978,109.178 cw(c86.682,108.882) 87.1,108.882 cw(c87.518,108.882) v1@87.222,109.178 ; v1@87.028,105.628 ccw(c86.732,105.332) 86.732,105.75 ccw(c86.732,106.168) v1@87.028,105.872 ; v1(87.1,109.3) 87.1,107.725 88.085,106.74 U38.28@89.292,106.74 93.81,106.74 v3(95.825,104.725) ; v3@95.317,104.725 ccw(c94.091,104.725) 94.958,105.592 ccw(c95.825,106.459) v3@95.825,105.233
  Top Layer w0.6: v2(48.8,134.475) 48.8,137.625 54.375,143.2 76.825,143.2 78.175,141.85 78.175,140.773 U93.1@78.232,140.716 ; U45.16@52.379,74.26 cw(c51.721,73.602) 52.651,73.602 ; U45.16@52.414,74.295 52.651,74.058 C36.2@52.651,71.571 52.847,71.375 v3(54.125,71.375) 55.525,69.975 58.95,69.975 60.375,71.4 60.375,73.821 C35.2@60.395,73.841 ; C36.2@52.726,71.553 ccw(c53.155,71.981) 53.155,71.375 ; v3@53.888,71.138 ccw(c53.316,70.566) 53.316,71.375 ccw(c53.316,72.184) v3@53.888,71.612 ; v3@54.125,71.04 cw(c54.125,70.231) 54.697,70.803 cw(c55.269,71.375) v3@54.46,71.375 ; C29.2@105.613,132.321 106.671,132.321 106.9,132.55 106.9,136.375 106.482,136.793 U44.8@105.42,136.793 105.42,139.295 107.034,140.909 R358.2@110.205,140.909 R359.2@112.237,140.909 R360.2@114.269,140.909 R361.2@116.301,140.909 137.934,140.909 141.35,144.325 146.425,144.325 147.925,142.825 146,140.9 146,140.625 ; 129.304,108.202 ccw(c130.552,108.202) C33.2@129.67,107.319 ; R153.2@129.304,110.53 129.304,107.628 C33.2@129.688,107.244 130.25,107.806 U41.3@133.483,107.806 137.206,107.806 138.476,109.076 U41.7@141.019,109.076 ; C33.2@129.857,107.169 cw(c131.395,105.63) 131.395,107.806 ; C33.2@129.888,107.244 cw(c130.371,107.244) C33.2@130.029,107.585 ; v2(139.025,128.75) 141.65,126.125 146.375,126.125 148.857,128.607 v2(148.857,129.957) 148.857,137.768 146,140.625 ; 142.725,110.325 142.704,110.346 U41.8@141.019,110.346 U41.7@141.019,109.076 ; v2(143.325,140.625) 146,140.625 ; P41.1@148.462,88.302 ccw(c147.694,89.07) 148.78,89.07 ccw(c149.866,89.07) P41.1@149.098,88.302 ; P41.1@148.78,87.984 148.78,101.53 v2(152.05,104.8) 147.774,109.076 U41.7@141.019,109.076
  Top Layer w0.8: v3(45,128.925) 45.017,128.908 R164.1@46.679,128.908 R163.1@48.711,128.908 R162.1@50.743,128.908 R161.1@52.775,128.908 ; v3@48.234,81.966 ccw(c47.734,82.466) 48.441,82.466 ; v3(48.4,81.8) 48.441,81.841 R149.2@48.441,83.369 ; R154.1@101.663,132.264 R152.1@103.695,132.264 C29.2@105.556,132.264
  Top Layer w1: J7.8@146.834,81.672 148.78,83.618 P41.1@148.78,87.984 ; R369.1@148.212,57.969 150.546,55.635 U92.4@153.465,55.635 ; v3@150.12,56.345 ccw(c151.836,58.061) U92.4@151.836,55.635 ; 150.995,55.635 cw(c150.995,54.014) U92.4@152.141,55.16 ; 151.092,55.635 ccw(c151.092,57.119) U92.4@152.141,56.069 ; C80.1@151.384,74.676 153.8,74.676 C81.2@154.489,73.987 ; C80.1@151.667,74.393 cw(c152.35,73.71) 152.35,74.676 cw(c152.35,75.642) C80.1@151.667,74.959 ; 152.958,74.676 cw(c152.958,72.55) C81.2@154.462,74.053 ; U92.4@153.03,56.069 ccw(c151.981,57.119) 153.465,57.119 ; 153.465,57.215 ccw(c155.086,57.215) U92.4@153.94,56.069 ; U92.2@153.465,62.365 U92.4@153.465,55.635 ; U92.4@153.485,55.615 U92.4@153.465,55.635
  Top Layer w1.5: v4@64.869,61.894 cw(c62.319,59.344) 65.925,59.344 ; v4@64.938,61.855 cw(c64.614,60.584) 65.925,60.584 ; v4@64.975,61.9 65.925,60.95 65.925,47.65 76.85,36.725 93.75,36.725 95.375,38.35 v4(95.375,39) ; 94.659,37.634 ccw(c93.294,39) v4@95.225,39
  Top Layer w2: C80.1@151.384,74.676 151.384,78.241 150.493,79.132 J7.7@146.834,79.132 J7.8@146.834,81.672 153.703,81.672 158.35,77.025 v3@158.35,69.225 ; U92.4@153.485,55.615 156.165,55.615 158.35,57.8 v3@158.35,69.225 ; U92.4@154.374,55.758 ccw(c154.374,60.427) 157.675,57.125 ; D60.2@162.052,69.268 v3(158.393,69.268) v3@158.35,69.225
  Bottom Layer w0.6: CN1.1@41.306,101.6 44.025,101.6 45.525,103.1 45.525,104.183 R145.2@45.539,104.197 ; CN1.1@41.722,101.184 cw(c42.728,100.178) 42.728,101.6 cw(c42.728,103.022) CN1.1@41.722,102.016 ; v2(48.8,134.475) 48.8,131.925 v2(51.8,128.925) ; v2(139.025,128.75) 139.025,126.4 141.2,124.225 145.05,124.225 146.575,122.7 151.1,122.7 152.524,121.276 R155.1@152.524,119.945 152.469,120 151,120 148.7,117.7 148.7,114.875 152.05,111.525 v2(152.05,104.8) ; v2@139.032,128.757 C31.2@141.182,128.757 ; C32.2@142.059,139.757 143.011,140.709 U43.3@146.28,140.709 ; C32.2@142.059,139.957 ccw(c142.059,140.44) C32.2@142.4,140.098 ; 142.475,140.173 cw(c143.325,139.323) v2@143.325,140.525 ; v2@143.396,140.554 cw(c143.769,140.181) 143.769,140.709 ; U42.3@146.475,129.957 v2(148.857,129.957) ; R156.2@152.073,102.051 152.073,104.748 154.884,107.559 J2.4@156.981,107.559 ; J2.4@156.469,107.347 ccw(c155.957,106.835) 155.957,107.559 ccw(c155.957,108.283) J2.4@156.469,107.771
  Bottom Layer w0.8: CN1.2@38.42,101.254 cw(c37.585,100.419) 38.766,100.419 cw(c39.947,100.419) 39.112,101.254 cw(c39.947,100.419) 39.947,101.6 cw(c39.947,102.781) CN1.2@39.112,101.946 ; CN1.1@40.96,101.254 ccw(c40.125,100.419) 40.125,101.6 ccw(c40.125,102.781) CN1.1@40.96,101.946 ; CN1.1@41.306,101.6 CN1.2@38.766,101.6 38.766,84.309 41.15,81.925 48.15,81.925 54.125,75.95 v3(54.125,71.375) ; v3(45,128.925) 47.575,126.35 47.575,120.425 46.375,119.225 45.751,119.225 R140.2@45.539,119.437 R141.2@45.539,116.897 46.668,116.897 47.44,116.125 47.44,110.09 46.75,109.4 45.662,109.4 R142.2@45.539,109.277 R143.2@45.539,106.737 R145.2@45.539,104.197 ; 47.531,81.925 cw(c47.531,80.931) v3@48.234,81.634 ; v3@48.635,81.8 ccw(c49.504,81.8) 48.89,81.185 ; 74.633,116.258 cw(c75.7,115.191) v1@75.7,116.7 ; 75.172,116.797 cw(c76.049,115.92) 76.049,117.161 ccw(c75.955,116.162) 75.246,116.871 ; v1@75.602,116.621 cw(c76.225,116.488) 76.225,117.125 75.5,117.125 74.6,116.225 74.6,113.75 76.381,111.969 C21.2@76.381,108.147 C17.2@76.381,106.623 76.381,105.156 76.3,105.075 76.875,104.5 86.475,104.5 87.195,105.22 C19.2@87.195,106.737 C20.2@87.195,108.261 C18.2@87.195,115.881 C22.2@87.195,117.405 87.195,118.255 86.625,118.825 83.325,118.825 81.667,117.167 C16.2@77.667,117.167 C15.2@76.143,117.167 ; 76.381,105.416 cw(c76.939,105.416) v1@76.544,105.811 ; 76.381,106.064 ccw(c76.939,106.064) v1@76.544,105.669 ; 76.538,105.313 ccw(c76.111,105.74) v1@76.715,105.74 ; 76.556,105.331 ccw(c76.171,105.716) v1@76.715,105.745 ; 86.649,118.801 cw(c85.347,117.499) C22.2@87.189,117.499 ; 86.914,104.939 ccw(c86.103,105.75) v1@87.25,105.75 ; C22.2@86.99,116.947 ccw(c86.493,117.443) C22.2@87.195,117.443 ; C22.2@86.99,117.089 cw(c86.493,116.592) 87.195,116.592
  Bottom Layer w1.5: v3(54.125,71.375) 55.6,71.375 v4(64.975,62) ; v4@95.325,39.075 95.325,59.609 P38.8@98.084,62.368
  Bottom Layer w2: v3@95.75,104.8 v3(95.825,104.725) 105.875,104.725 110.998,99.602 L1.1@110.998,96.012 111.236,96.25 119.3,96.25 129.725,85.825 142.681,85.825 J7.8@146.834,81.672 J7.7@146.834,79.132 ; P38.7@98.084,59.828 P38.8@98.084,62.368 110.227,50.225 147.7,50.225 150.025,52.55 v3(150.025,56.25)
  other v1: 75.7,116.6
+5V: BZ2.1 C44.2 C79.2 D58.1 DZ1.2 J7.1 J7.2 P4.6 P4.7 P6.1 P30.1 P37.1 P37.2 R171.2 R370.1 U49.8 U50.8 U92.3 | length 476.2
  Top Layer w0.5: v2(103.75,72.575) 103.75,70.65 104.275,70.125 104.294,70.144 U50.8@109.35,70.144 ; R171.2@119.38,82.296 125.771,82.296 v2(131.575,88.1) ; R171.2@119.76,81.916 cw(c120.677,80.999) 120.677,82.296 cw(c120.677,83.593) R171.2@119.76,82.676 ; U49.8@125.984,76.708 v2(127.308,76.708) v2@127.325,76.725 ; v2(129.75,74.375) 129.75,73.1 131.73,71.12 DZ1.2@134.112,71.12 ; DZ1.2@133.435,70.943 ccw(c133.008,70.516) 133.008,71.12 ccw(c133.008,71.724) DZ1.2@133.435,71.297 ; v2(150.15,90.05) 162.175,78.025 169.2,78.025 171.9,75.325 171.9,67.975 170.473,66.548 ; P30.1@168.148,66.548 170.473,66.548 ; P30.1@169.222,65.862 cw(c170.473,65.064) 170.473,66.548 ; P30.1@169.222,67.234 ccw(c170.473,68.032) 170.473,66.548
  Top Layer w0.8: C44.2@117.405,82.115 119.199,82.115 R171.2@119.38,82.296 ; 118.008,82.115 ccw(c118.008,83.668) R171.2@119.106,82.57
  Top Layer w1: U92.3@151.08,63.222 ccw(c150.482,63.82) 151.327,63.82 ; U92.3@151.175,62.365 151.327,62.517 C79.2@151.327,65.713
  Top Layer w2: D58.1@84.836,41.656 85.968,40.524 ; 87.327,40.524 cw(c87.327,44.047) 84.836,41.556 ccw(c85.968,41.661) 85.968,40.524 ; P37.2@91.376,43.064 P37.1@91.376,40.524 85.968,40.524 ; J7.1@146.589,63.842 ccw(c148.201,64.17) 148.201,62.525 ; J7.1@146.657,63.715 ccw(c149.531,66.589) 149.531,62.525 ; J7.2@146.834,66.432 J7.1@146.834,63.892 148.201,62.525 ; 150.375,62.525 148.201,62.525
  Bottom Layer w0.5: P6.1@36.584,133.096 ccw(c35.377,133.096) 36.23,133.95 ccw(c37.084,134.803) P6.1@37.084,133.596 ; P6.1@37.084,133.096 35.7,134.48 35.7,144.15 36.45,144.9 50.475,144.9 54.42,140.955 54.42,137.78 59.5,132.7 BZ2.1@59.5,130.556 ; BZ2.1@59.146,130.91 ccw(c58.293,131.763) 59.5,131.763 ccw(c60.707,131.763) BZ2.1@59.854,130.91 ; v2(131.575,88.1) 137.975,88.1 139.925,90.05 v2(150.15,90.05)
  Bottom Layer w0.8: R171.2@119.38,81.909 cw(c119.38,80.973) 120.041,81.635 cw(c120.703,82.296) R171.2@119.767,82.296 ; R171.2@119.38,82.296 123.251,78.425 126.275,78.425 127.308,77.392 v2(127.308,76.708) ccw(c125.657,76.708) 126.824,77.876
  Bottom Layer w1.5: 36.375,131.384 cw(c38.796,131.384) P6.1@37.084,133.096 ; R370.1@39.24,127.057 37.084,129.213 P6.1@37.084,133.096 ; P37.1@91.376,40.524 86.627,35.775 39.5,35.775 37.1,38.175 37.1,98.775 36.375,99.5 36.375,132.387 P6.1@37.084,133.096
  Bottom Layer w2: 89.003,43.797 ccw(c91.376,46.17) P37.2@91.376,42.814 ; P37.1@91.376,40.524 P37.2@91.376,43.064 ; P37.2@91.594,43.064 P37.2@91.376,43.064 ; P4.6@109.156,87.984 109.156,78.631 100.763,70.238 91.088,70.238 88.125,67.275 88.125,44.675 89.736,43.064 P37.2@91.376,43.064 ; J7.1@146.834,63.892 J7.2@146.834,66.432
  Bottom Layer w2.8: P4.6@109.156,87.984 109.246,87.894 109.246,86.969 120.69,75.525
  Bottom Layer w3: P4.7@106.616,87.984 P4.6@109.156,87.984 ; 120.69,75.525 141.75,75.525 143.825,73.45 143.825,66.901 J7.1@146.834,63.892
  other v2: 142.225,75.975
_ADC_IN3: P30.2 R199.2 | length 60.3
  Top Layer w0.8: R199.2@136.595,60.125 136.595,54.13 137.35,53.375 159.15,53.375 162.825,57.05 162.825,66.45 166.733,70.358 P30.2@168.148,70.358 ; 163.814,67.439 cw(c168.148,63.104) P30.2@168.148,69.234 ; 165.179,68.804 cw(c168.148,65.836) P30.2@168.148,70.034 ; 166.545,70.17 cw(c168.148,68.567) P30.2@168.148,70.834
_ADC_IN4: P11.1 R200.2 | length 57.8
  Top Layer w0.8: R200.2@110.7,43.991 115.034,48.325 155.675,48.325 159.512,44.488 ; P11.1@158.814,43.045 ccw(c157.672,44.488) 159.512,44.488 ; P11.1@159.512,42.164 159.512,44.488 ; P11.1@160.21,43.045 cw(c161.352,44.488) 159.512,44.488
_ADC_IN5: P10.1 R201.2 | length 15.7
  Top Layer w0.8: R201.2@124.202,44.12 124.757,44.675 ; R201.2@124.207,44.209 cw(c125.332,43.084) 125.332,44.675 ; R201.2@124.209,44.213 cw(c124.757,44.118) 124.757,44.675 ; 132.727,44.348 cw(c131.189,42.809) P10.1@133.291,42.248 ; P10.1@133.604,42.164 133.604,43.471 132.4,44.675 124.757,44.675
_ADC_IN6: P12.1 R202.2 | length 29.6
  Top Layer w0.8: R202.2@119.53,44.061 121.419,45.95 140.725,45.95 142.24,44.435 ; P12.1@141.558,43.058 ccw(c140.508,44.435) 142.24,44.435 ; P12.1@142.24,42.164 142.24,44.435 ; P12.1@142.922,43.058 cw(c143.972,44.435) 142.24,44.435
_ADC_IN7: P9.1 R363.2 | length 43.9
  Top Layer w0.8: R363.2@115.077,43.991 118.186,47.1 148.3,47.1 150.876,44.524 ; P9.1@150.168,43.037 ccw(c148.961,44.524) 150.876,44.524 ; P9.1@150.876,42.164 150.876,44.524 ; P9.1@151.584,43.037 cw(c152.791,44.524) 150.876,44.524
ADC1: C51.1 R190.2 U38.23 | length 41
  Top Layer w0.254: U38.23@86.692,104.14 86.692,99.558 95.375,90.875 95.375,83.025 104.068,74.332 C51.1@105.343,74.332 ; C51.1@105.052,74.134 ccw(c104.575,73.657) 104.575,74.332 ccw(c104.575,75.006) C51.1@105.052,74.529
  Top Layer w0.8: C51.1@105.343,74.332 105.467,74.208 R190.2@105.467,72.741
ADC2: C49.1 R185.2 U38.35 | length 87
  Top Layer w0.254: U38.35@89.292,110.24 110.015,110.24 v1(110.75,110.975) ; v1@110.577,110.975 cw(c110.159,110.975) 110.455,110.68 cw(c110.75,110.384) v1@110.75,110.802 ; v1@110.628,105.503 ccw(c110.332,105.207) 110.332,105.625 ccw(c110.332,106.043) v1@110.628,105.747 ; v1(110.75,105.625) 109.9,105.625 109.05,104.775 109.05,96.225 102.95,90.125 102.95,86.15 110.2,78.9 v1(112.05,78.9) ; v1@111.928,78.778 ccw(c111.632,78.482) 111.632,78.9 ccw(c111.632,79.318) v1@111.928,79.022
  Top Layer w0.8: v1(120.75,68.825) 120.925,68.65 C49.1@122.328,68.65 R185.2@122.328,63.946
  Bottom Layer w0.254: v1@110.628,105.747 ccw(c110.332,106.043) 110.75,106.043 ccw(c111.168,106.043) v1@110.872,105.747 ; v1@110.628,110.853 cw(c110.332,110.557) 110.75,110.557 cw(c111.168,110.557) v1@110.872,110.853 ; v1(110.75,105.625) v1(110.75,110.975) ; v1@112.05,78.727 cw(c112.05,78.309) 112.345,78.605 cw(c112.641,78.9) v1@112.223,78.9 ; v1(112.05,78.9) 120.75,70.2 v1(120.75,68.825) ; v1@120.628,68.947 ccw(c120.332,69.243) 120.75,69.243 ccw(c121.168,69.243) v1@120.872,68.947
ADC3: C53.1 R199.1 U38.36 | length 100.9
  Top Layer w0.254: U38.36@89.292,110.74 109.24,110.74 v1(110,111.5) ; v1@109.827,111.5 cw(c109.409,111.5) 109.705,111.205 cw(c110,110.909) v1@110,111.327 ; v1@109.953,104.703 cw(c109.657,104.407) 110.075,104.407 cw(c110.493,104.407) v1@110.197,104.703 ; v1(110.075,104.825) 110.075,96 103.5,89.425 103.5,86.875 110.625,79.75 v1(112.425,79.75) ; v1@112.303,79.628 ccw(c112.007,79.332) 112.007,79.75 ccw(c112.007,80.168) v1@112.303,79.872
  Top Layer w0.6: 135.173,63.457 ccw(c134.582,63.457) v1(135,63.875) 135.173,63.702 C53.1@135.173,61.785 136.528,61.785 R199.1@136.595,61.852 ; 136.082,61.785 ccw(c136.082,62.271) R199.1@136.426,61.927
  Bottom Layer w0.254: v1@109.878,111.378 cw(c109.582,111.082) 110,111.082 cw(c110.418,111.082) v1@110.122,111.378 ; 110,105.424 ccw(c110.674,105.424) v1@110.197,104.947 ; v1(110,111.5) 110,104.9 v1(110.075,104.825) ; v1@112.425,79.577 cw(c112.425,79.159) 112.72,79.455 cw(c113.016,79.75) v1@112.598,79.75 ; v1(112.425,79.75) 119.15,73.025 130.275,73.025 132.125,71.175 132.125,66.75 v1(135,63.875) ; v1@134.827,63.875 ccw(c134.409,63.875) 134.705,64.17 ccw(c135,64.466) v1@135,64.048
ADC4: C55.1 R200.1 U38.15 | length 89.3
  Top Layer w0.254: U38.15@82.692,104.14 82.692,88.966 77.546,83.82 77.546,73.609 82.652,68.504 95.496,68.504 100.7,63.3 100.7,47.075 100.675,47.05 103.734,43.991 R200.1@108.973,43.991 ; R200.1@108.775,43.793 ccw(c108.298,43.316) 108.298,43.991 ccw(c108.298,44.665) R200.1@108.775,44.188
  Top Layer w0.8: 108.973,42.979 ccw(c109.786,42.979) C55.1@109.211,42.405 ; R200.1@108.973,43.991 108.973,42.727 C55.1@109.3,42.4
ADC5: C56.1 R201.1 U38.16 | length 107.2
  Top Layer w0.254: U38.16@83.192,104.14 83.192,88.526 78.181,83.515 78.181,73.711 82.829,69.063 96.088,69.063 101.346,63.805 101.346,47.371 104.042,44.675 v1(104.25,44.675) ; 103.6,45.117 ccw(c104.25,45.768) v1@104.25,44.848
  Top Layer w0.8: v2(121.15,43.225) 122.045,44.12 R201.1@122.475,44.12 122.475,42.856 C56.1@122.802,42.529 ; 121.57,43.645 cw(c122.475,42.74) R201.1@122.475,44.02 ; 121.83,43.905 cw(c122.356,43.379) R201.1@122.474,44.114 ; 122.475,43.109 ccw(c123.288,43.109) C56.1@122.713,42.534
  Bottom Layer w0.254: v1@104.25,44.502 cw(c104.25,44.084) 104.545,44.38 cw(c104.841,44.675) v1@104.423,44.675 ; v1(104.25,44.675) 104.975,43.95 108.95,43.95 111.175,41.725 119.65,41.725 v2(121.15,43.225) ; v2@120.877,43.225 cw(c120.218,43.225) 120.684,42.759 cw(c121.15,42.293) v2@121.15,42.952
ADC6: C57.1 R202.1 U38.17 | length 101.1
  Top Layer w0.254: U38.17@83.692,104.14 83.692,87.908 78.74,82.956 78.74,74.168 83.261,69.647 96.418,69.647 101.981,64.084 101.981,47.703 104.317,45.367 ; 103.757,45.928 ccw(c104.692,46.863) v1@104.692,45.54 ; 104.19,45.494 ccw(c104.692,45.996) v1@104.692,45.286 ; 104.35,45.4 104.317,45.367 ; v1@104.725,45.4 v1(104.692,45.367) 104.317,45.367
  Top Layer w0.8: v2(116.75,43.325) 117.486,44.061 R202.1@117.803,44.061 117.803,42.797 C57.1@118.13,42.47 ; 117.091,43.666 cw(c117.803,42.955) R202.1@117.803,43.961 ; 117.803,43.05 ccw(c118.616,43.05) C57.1@118.041,42.475
  Bottom Layer w0.254: v1@104.692,45.194 cw(c104.692,44.776) 104.987,45.072 cw(c105.283,45.367) v1@104.865,45.367 ; v1(104.692,45.367) 105.234,44.825 109.1,44.825 111.6,42.325 115.75,42.325 v2(116.75,43.325) ; v2@116.477,43.325 cw(c115.818,43.325) 116.284,42.859 cw(c116.75,42.393) v2@116.75,43.052
ADC7: C76.1 R363.1 U38.18 | length 95.2
  Top Layer w0.254: U38.18@84.192,104.14 84.192,97.291 86.309,95.174 86.309,91.384 85.525,90.6 85.525,88.65 79.451,82.576 79.451,74.498 83.537,70.412 96.644,70.412 102.591,64.465 102.591,48.834 v1(105.85,45.575) ; v1@105.677,45.575 ccw(c105.259,45.575) 105.555,45.87 ccw(c105.85,46.166) v1@105.85,45.748
  Top Layer w0.8: v2(112.3,43.325) 112.966,43.991 R363.1@113.35,43.991 113.35,42.727 C76.1@113.677,42.4 ; v2@112.523,43.548 cw(c113.35,42.722) R363.1@113.35,43.891 ; 113.35,42.979 ccw(c114.163,42.979) C76.1@113.588,42.405
  Bottom Layer w0.254: v1(105.85,45.575) 110.05,45.575 v2(112.3,43.325) ; v1@105.972,45.453 cw(c106.268,45.157) 106.268,45.575 cw(c106.268,45.993) v1@105.972,45.697 ; v2@112.027,43.325 ccw(c111.368,43.325) 111.834,43.791 ccw(c112.3,44.257) v2@112.3,43.598
BOOT0: R147.2 U38.94 | length 12.2
  Top Layer w0.254: R147.2@63.827,107.774 cw(c63.827,106.874) 64.464,107.51 ; R147.2@63.827,108.147 64.634,107.34 70.527,107.34 71.927,108.74 U38.94@74.092,108.74 ; R147.2@64.106,108.053 ccw(c64.555,108.053) 64.238,107.736
BUZZ: R165.2 U38.84 | length 46.5
  Top Layer w0.254: v1@55.975,139.652 cw(c55.975,139.234) 56.27,139.53 cw(c56.566,139.825) v1@56.148,139.825 ; v1(55.975,139.825) 57.625,138.175 57.625,126.23 54.525,123.13 54.525,118.7 59.408,113.817 59.436,113.817 59.513,113.74 U38.84@74.092,113.74
  Bottom Layer w0.6: R165.2@55.937,140.897 55.937,139.863 v1(55.975,139.825)
CAN1_RX: U38.70 U42.4 | length 96.4
  Top Layer w0.254: v1@77.278,133.659 cw(c76.982,133.364) 77.4,133.364 cw(c77.818,133.364) v1@77.522,133.659 ; v1(77.4,133.782) 77.4,128.35 78.192,127.558 U38.70@78.192,119.34 ; 107.137,124.693 ccw(c107.68,124.693) v1@107.341,124.27 ; v1(107.391,124.333) 107.137,124.587 107.137,125.222 ; v1@107.499,124.468 cw(c108.103,125.222) 107.137,125.222 ; v1@144.602,131.15 ccw(c144.184,131.15) 144.48,131.445 ccw(c144.775,131.741) v1@144.775,131.323 ; v1(144.775,131.15) 143.616,132.309 116.357,132.309 110.566,126.517 108.433,126.517 107.137,125.222
  Bottom Layer w0.254: v1@77.4,133.655 86.106,133.655 89.357,130.404 99.124,130.404 104.483,125.044 106.68,125.044 v1(107.391,124.333) ; v1@77.522,133.904 ccw(c78.124,134.506) 78.124,133.655 ; v1@107.218,124.333 ccw(c106.801,124.333) 107.096,124.628 ccw(c107.391,124.924) v1@107.391,124.506
  Bottom Layer w0.6: v1(144.775,131.15) 144.852,131.227 U42.4@146.475,131.227
CAN1_TX: U38.71 U42.1 | length 98
  Top Layer w0.254: v1@76.357,131.729 cw(c76.072,131.444) 76.475,131.444 ; 76.475,131.423 cw(c76.908,131.423) v1@76.602,131.729 ; v1@76.475,131.851 76.475,128.575 77.692,127.358 U38.71@77.692,119.34 ; v1@108.082,123.795 ccw(c107.786,124.09) 108.204,124.09 ccw(c108.622,124.09) v1@108.326,123.795 ; v1(108.204,123.673) 108.204,124.79 109.372,125.959 110.947,125.959 116.738,131.75 142.85,131.75 144.475,130.125 v1(144.475,127.475) ; v1@144.353,127.597 ccw(c144.057,127.893) 144.475,127.893 ccw(c144.893,127.893) v1@144.597,127.597
  Bottom Layer w0.254: v1@76.475,131.902 76.475,131.872 77.648,133.045 85.217,133.045 88.671,129.591 98.831,129.591 104.216,124.206 106.426,124.206 106.959,123.673 v1(108.204,123.673) ; v1@76.479,132.024 ccw(c76.479,132.381) 76.731,132.129 ; v1@76.652,131.851 cw(c77.131,131.851) 76.793,132.19 ; v1@108.082,123.55 ccw(c107.786,123.255) 107.786,123.673 ccw(c107.786,124.09) v1@108.082,123.795
  Bottom Layer w0.6: v1(144.475,127.475) 144.533,127.417 U42.1@146.475,127.417
  other v1: 76.479,131.851
CAN1H: C74.1 D54.2 P43.1 R159.1 R354.2 Z2.1 | length 44.3
  Top Layer w0.6: Z2.1@155.579,128.377 157.502,126.454 D54.2@159.797,126.454 ; D54.2@159.202,125.959 ccw(c158.007,124.764) 158.007,126.454 ccw(c158.007,128.144) D54.2@159.202,126.949
  Top Layer w2: D54.2@159.797,126.454 161.791,124.46 P43.1@171.704,124.46 ; 161.71,124.541 ccw(c162.75,125.58) v3@162.75,124.11
  Bottom Layer w0.6: C74.1@152.595,124.602 154.927,124.602 156.925,126.6 156.925,128.064 R354.2@156.683,128.306 ; C74.1@152.842,124.355 cw(c153.44,123.757) 153.44,124.602 cw(c153.44,125.447) C74.1@152.842,124.849 ; R354.2@156.436,127.959 cw(c155.254,126.777) 156.925,126.777
  Bottom Layer w1: R354.2@156.683,128.306 159.731,128.306 R159.1@159.797,128.372 161.003,128.372 162.75,126.625 v3(162.75,124.475) ; R159.1@159.897,128.222 cw(c159.897,125.19) 162.041,127.334 ; R159.1@159.94,128.228 cw(c160.405,126.668) 161.556,127.819
CAN1L: C75.2 D54.1 P43.2 R159.2 R355.2 Z2.2 | length 45.3
  Top Layer w0.6: Z2.2@155.579,130.277 156.656,131.354 D54.1@159.797,131.354 ; D54.1@159.202,130.859 ccw(c158.007,129.664) 158.007,131.354 ccw(c158.007,133.044) D54.1@159.202,131.849
  Top Layer w2: D54.1@159.797,131.354 164.596,131.354 167.6,128.35 171.624,128.35 P43.2@171.704,128.27
  Bottom Layer w0.6: C75.2@142.501,133.172 155.328,133.172 156.683,131.817 R355.2@156.683,130.338 ; C75.2@142.848,132.925 cw(c143.446,132.327) 143.446,133.172 cw(c143.446,134.017) C75.2@142.848,133.419 ; R355.2@156.436,130.685 ccw(c155.838,131.283) 156.683,131.283 ccw(c157.528,131.283) R355.2@156.93,130.685
  Bottom Layer w1: R355.2@156.683,130.338 159.731,130.338 R159.2@159.797,130.272 161.047,130.272 v3(162.1,131.325)
CAN2_RX: U38.91 U43.4 | length 109
  Top Layer w0.254: v1@70.468,110.032 cw(c70.969,109.531) 70.969,110.24 ; v1(70.525,109.975) 70.79,110.24 U38.91@74.092,110.24 ; v1@70.647,109.853 cw(c71.582,108.918) 71.582,110.24 ; v1@105.847,123.368 ccw(c105.429,123.368) 105.724,123.663 ccw(c106.02,123.958) v1@106.02,123.541 ; v1(106.02,123.368) 105.45,123.937 105.45,125.999 107.315,127.864 110.185,127.864 115.997,133.675 133.525,133.675 141.9,142.05 v1(144.675,142.05) ; v1@144.553,141.928 ccw(c144.257,141.632) 144.257,142.05 ccw(c144.257,142.468) v1@144.553,142.172
  Bottom Layer w0.254: v1(70.525,109.975) 71.3,110.75 71.3,119.916 73.5,122.116 87.343,122.116 93.777,128.549 98.958,128.549 104.14,123.368 v1(106.02,123.368) ; v1@70.525,110.148 ccw(c70.525,110.566) 70.82,110.27 ccw(c71.116,109.975) v1@70.698,109.975 ; v1@105.897,123.245 ccw(c105.602,122.95) 105.602,123.368 ccw(c105.602,123.785) v1@105.897,123.49
  Bottom Layer w0.6: v1(144.675,142.05) 144.746,141.979 U43.4@146.28,141.979
CAN2_TX: U38.92 U43.1 | length 108.6
  Top Layer w0.254: v1@70.475,109.044 ccw(c70.475,109.512) 70.806,109.181 ; v1(70.475,109.125) 70.75,109.125 71.365,109.74 U38.92@74.092,109.74 ; v1@70.475,109.298 ccw(c70.475,110.38) 71.24,109.615 ; v1@106.761,122.855 ccw(c106.466,123.15) 106.883,123.15 ccw(c107.301,123.15) v1@107.006,122.855 ; v1(106.883,122.733) 106.883,123.901 106.299,124.485 106.299,125.806 107.823,127.33 110.515,127.33 116.154,132.969 134.061,132.969 139.367,138.275 v1(144.4,138.275) ; v1@144.278,138.153 ccw(c143.982,137.857) 143.982,138.275 ccw(c143.982,138.693) v1@144.278,138.397
  Bottom Layer w0.254: v1@70.475,109.044 ccw(c70.475,109.512) 70.806,109.181 ; v1(70.475,109.125) 70.75,109.125 71.975,110.35 71.975,119.397 74.168,121.59 87.706,121.59 94.056,127.94 98.831,127.94 104.171,122.601 106.751,122.601 v1(106.883,122.733) ; v1@70.475,109.298 ccw(c70.475,110.38) 71.24,109.615 ; 106.146,122.601 ccw(c106.146,123.47) v1@106.761,122.855
  Bottom Layer w0.6: v1(144.4,138.275) 144.506,138.169 U43.1@146.28,138.169
CAN2H: C72.1 D53.2 P44.1 R160.1 R356.2 Z1.1 | length 39.7
  Top Layer w0.6: Z1.1@156.713,139.124 156.713,138.037 157.625,137.125 ; D53.2@158.391,137.562 cw(c157.625,138.015) 157.625,137.125 ; D53.2@158.468,136.744 ccw(c157.625,136.002) 157.625,137.125 ; D53.2@159.094,137.206 159.013,137.125 157.625,137.125
  Top Layer w2: D53.2@159.094,137.206 165.819,137.206 170.945,132.08 P44.1@171.704,132.08 ; 169.514,133.511 ccw(c171.704,135.701) P44.1@171.704,132.604
  Bottom Layer w0.6: C72.1@152.233,135.437 152.246,135.45 154.875,135.45 156.488,137.063 R356.2@156.488,139.058 ; C72.1@152.48,135.19 cw(c153.109,134.561) 153.109,135.45 ; C72.1@152.48,135.684 ccw(c153.047,136.251) 153.047,135.45 ; R356.2@156.241,138.711 cw(c155.643,138.113) 156.488,138.113 cw(c157.333,138.113) R356.2@156.735,138.711
  Bottom Layer w1: R356.2@156.488,139.058 159.028,139.058 R160.1@159.094,139.124 161.076,139.124 v3(162.875,137.325)